# EAGLE board FMBTECH (EAGLE 8.4.3)
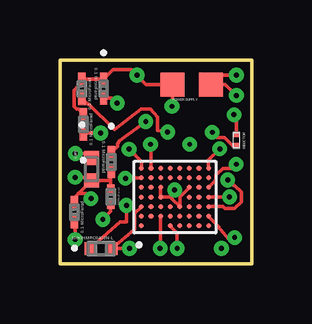
[diagram p0: board, top side]
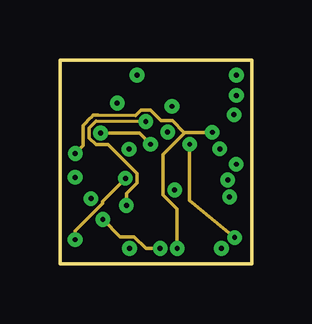
[diagram p1: board, inner layer Route4]
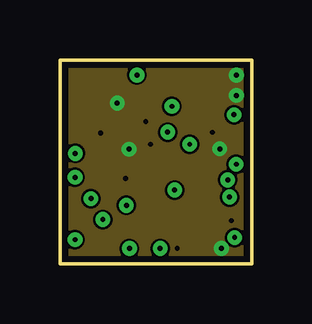
[diagram p2: board, inner layer Route8]
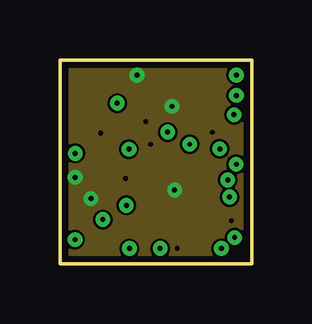
[diagram p3: board, inner layer Route10]
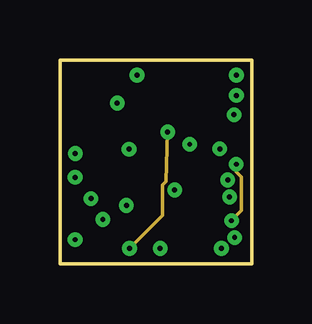
[diagram p4: board, inner layer Route12]
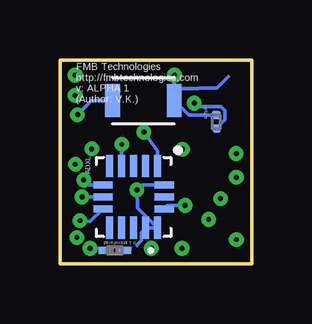
[diagram p5: board, bottom side, seen from below]

Size 8 x 8.5 mm. Coordinates in mm from the lower left corner, seen from the top.
Outline: 0,0 8,0 8,8.5 0,8.5 0,0
Copper layers (((1*4)*8*10)*(12*16)): Top 0.035mm / dielectric 1.5mm / Route4 0.035mm / dielectric 0.15mm / Route8 0.035mm / dielectric 0.15mm / Route10 0.035mm / dielectric 0.15mm / Route12 0.035mm / dielectric 0.15mm / Bottom 0.035mm
Design rules "default *": minimum track width 4mil, minimum drill 8mil, track to track 4mil, track to pad 4mil, pad to pad 4mil, via to via 4mil, smd to smd 2mil, copper to edge 10mil, drill to drill 10mil, minimum pad ring 10mil, minimum via ring 8mil, stop-mask expansion 4mil, vias tented up to drill 0mil, thermal gap 10mil

## Footprints (pad centres in the part's own frame; a part is rotated, then mirrored left to right if it is on the bottom)
TFLGA-16/3.3MMX3.1MM = smd 0.925 x 0.3: 1 -1.288,1; 2 -1.288,0.5; 3 -1.288,0; 4 -1.288,-0.5; 5 -1.288,-1; 9 1.288,-1; 10 1.288,-0.5; 11 1.288,0; 12 1.288,0.5; 13 1.288,1 | smd 0.3 x 0.8: 6 -0.5,-1.275; 7 0,-1.275; 8 0.5,-1.275; 14 0.5,1.275; 15 0,1.275; 16 -0.5,1.275
1 = smd 0.62 x 1.36: 1 0,0; 2 2.58,0
0201 = smd 0.559 x 0.305: 1 -0.394,0; 2 0.394,0
G-033 = smd 0.406 x 0.305: 1 -0.305,0; 2 0.305,0
BGA50N40P7X8_300X320X40 = smd 0.2 x 0.2: A1 -1.2,1.4; A2 -0.8,1.4; A3 -0.4,1.4; A4 0,1.4; A5 0.4,1.4; A6 0.8,1.4; A7 1.2,1.4; B2 -0.8,1; B3 -0.4,1; B4 0,1; B5 0.4,1; B6 0.8,1; B7 1.2,1; C2 -0.8,0.6; C3 -0.4,0.6; C4 0,0.6; C5 0.4,0.6; C6 0.8,0.6; C7 1.2,0.6; D1 -1.2,0.2; D2 -0.8,0.2; D3 -0.4,0.2; D6 0.8,0.2; D7 1.2,0.2; E1 -1.2,-0.2; E2 -0.8,-0.2; E3 -0.4,-0.2; E6 0.8,-0.2; E7 1.2,-0.2; F1 -1.2,-0.6; F2 -0.8,-0.6; F3 -0.4,-0.6; F4 0,-0.6; F5 0.4,-0.6; F6 0.8,-0.6; F7 1.2,-0.6; G1 -1.2,-1; G2 -0.8,-1; G3 -0.4,-1; G4 0,-1; G5 0.4,-1; G6 0.8,-1; G7 1.2,-1; H1 -1.2,-1.4; H2 -0.8,-1.4; H3 -0.4,-1.4; H4 0,-1.4; H5 0.4,-1.4; H6 0.8,-1.4; H7 1.2,-1.4
RES = smd 0.457 x 0.508: 1 -0.457,0; 2 0.457,0
CAP = smd 0.34 x 0.36: 1 -0.28,0; 2 0.28,0
CAP' = smd 0.58 x 0.62: 1 -0.47,0; 2 0.47,0
1' = smd 0.23 x 0.3: 1 -0.235,0; 2 0.235,0
SUPPLY = smd 1 x 1: P$1 0,0; P$2 1.6,0

## Placement (x,y rotation side)
ADXL  ADXL362  [TFLGA-16/3.3MMX3.1MM]  4.92,2.78 270 bottom
ANT1  ANTENNASMD  [1]  5.81,6.8 0 bottom
C1  02016D104KAT2A  [0201]  0.98,5.81 90 top
C2  02016D104KAT2A  [0201]  0.61,2.15 90 top
C3  GRM0335C1E101JA01D  [G-033]  2.12,2.78 90 top
C6  02016D104KAT2A  [0201]  5.71,0.55 180 bottom
C7  02016D104KAT2A  [0201]  1.82,7.3 270 top
C8  02016D104KAT2A  [0201]  2.14,4.24 270 top
C9  02016D104KAT2A  [0201]  0.92,7.29 90 top
NRF  NRF52832-CIAA-R  [BGA50N40P7X8_300X320X40]  4.8,2.78 90 top
R6  100OHMRC0402N-L  [RES]  1.72,0.63 180 top
U$1  4.7µF  [CAP]  1.48,5.91 270 bottom
U$2  0.8PF  [CAP']  1.32,3.94 270 top
U$3  INDUCTOR  [1']  7.37,5.15 90 top
U$4  SUPPLY  [SUPPLY]  4.69,7.48 0 top

## Library data of the parts
ADXL = ADXL362; AVAILABILITY: Good; DESCRIPTION: Accelerometer Triple ±2/±4/±8g 1.6V to 3.6V 16-Pin LGA T/R; MF: Analog Devices; MP: ADXL362BCCZ-RL7; PACKAGE: LGA-16 Analog Devices; PRICE: 6.52 USD
ANT1 = antenna; AVAILABILITY: Good; DESCRIPTION: Bluetooth/WLAN/WiFi Ceramic Chip Antenna 3-Pin SMD; MF: Pulse; MP: W3008; PACKAGE: None; PRICE: 0.93 USD
C1 C2 C6-C9 = cap_1microfarad; MANUFACTURER_PART_NUMBER: 02016D104KAT2A; VENDOR: AVX Corporation
C3 = cap_100picofarad; MANUFACTURER_PART_NUMBER: GRM0335C1E101JA01D; VENDOR: Murata
NRF = NRF52832-CIAA-R; AVAILABILITY: Good; DESCRIPTION: Multi Protocal Bluetooth Smart ANT 2.4GHz RF SoC (WL-CSP); MF: Nordic Semiconductor; MP: NRF52832-CIAA-R; PACKAGE: XFBGA-50 Nordic Semiconductor; PRICE: 3.94 USD
R6 = 100ohm; MANUFACTURER_PART_NUMBER: RC0402FR07100RL; VENDOR: Yageo
U$1 = 4p7microfarad
U$2 = 0p8picofarad
U$3 = inductor
U$4 = supply

## Nets
ADXL_POWER: ADXL.1 C9.1 NRF.A3 R6.1
ANT: NRF.D1 U$2.1 U$3.1
CS: ADXL.8 NRF.H5
DCC: NRF.B6
DEC2: NRF.A2
GND: ADXL.12 ADXL.13 ADXL.16 ANT1.2 C1.2 C2.2 C3.2 C6.1 C7.1 C8.2 C9.2 NRF.C4 NRF.C5 NRF.E3 NRF.F5 U$1.1 U$2.2 U$4.P$1
MISO: ADXL.7 NRF.H4
MOSI: ADXL.6 NRF.H3
N$5: ANT1.1 U$3.2
N$6: C2.1 NRF.A6
N$8: C1.1 NRF.B7
N$9: C3.1 NRF.C2
N$10: ADXL.14 C8.1 R6.2
RESET: NRF.H1
SCL: NRF.G7
SCLK: ADXL.4 NRF.H2
SDA: NRF.F7
STATUSLED: NRF.H6
SWDCLK: NRF.F1
SWDIO: NRF.G1
TMP_POWER: NRF.A4
VCC: C6.2 C7.2 NRF.A7 NRF.H7 U$1.2 U$4.P$2
VSS_PA: NRF.D2

## Tracks (layer width: path | path; a pad name or v marks a point on that pad's centre or on a via)
ADXL_POWER  (via drill 0.2 pad 0.46)
  Top 0.152: NRF.A3 3.12,2.09 3.12,1.44 R6.1 2.33,0.64 v2.9,0.64 | 0.84,6.82 C9.1 1.15,6.66 1.2,6.66 2.27,5.59 3.38,6.45 3.78,6.45 4.07,6.11 4.07,5.56 v4.49,5.49
  Route12 0.152: v4.49,5.49 4.42,3.42 4.28,3.27 4.28,2.01 v2.9,0.64
  Bottom 0.152: v4.49,5.49 3.92,4.71 ADXL.1
ANT  (via drill 0.2, 0.2 layers 1-4)
  Top 0.152: v6.36,5.48 6.57,5.27 6.87,5.27 7.23,4.92 U$3.1 | v4.89,0.64 4.89,1.29 NRF.D1 | U$2.1 1.14,4.6 v0.64,4.6
  Route4 0.152: 6.34,5.46 v6.36,5.48 5.19,5.48 | v0.64,4.6 0.96,4.92 0.96,5.75 1.04,5.82 1.25,6.05 1.32,6.12 1.39,6.2 1.4,6.2 1.5,6.2 1.6,6.2 3.16,6.19 3.38,6.41 3.78,6.41 4.22,5.97 4.69,5.97 5.19,5.48 | 5.19,5.48 5.19,5.43 4.3,4.55 4.3,2.87 4.89,2.28 v4.89,0.64
CS  (via drill 0.2 pad 0.46, 0.2 pad 0.46 layers 12-16)
  Top 0.152: v7.36,4.15 7.19,3.97 6.8,3.97 6.52,3.69 6.52,3.5 NRF.H5
  Route12 0.152: v7.36,4.15 7.36,3.82 7.56,3.61 7.56,2.22 v7.16,1.79
  Bottom 0.152: ADXL.8 6.73,1.75 v7.16,1.79
GND  (via drill 0.2, 0.2 pad 0.46, 0.2 pad 0.46 layers 1-10)
  Top 0.152: v4.68,6.56 4.69,6.58 U$4.P$1 3.6,7.48 v3.22,7.87 2.99,8.09 2.22,8.09 C7.1 0.93,7.7 C9.2 0.92,7.58 0.59,7.25 0.59,6.54 0.69,6.44 0.79,6.44 C1.2 | 2.12,3.44 C3.2 | 2.12,3.44 2.12,3.83 C8.2 | NRF.C5 NRF.C4 4.6,2.78 4.69,2.7 | 4.69,2.7 NRF.E3 5,2.78 NRF.F5 | 4.69,2.7 4.69,3 v4.78,3.07 | C2.2 0.61,2.76 U$2.2 | U$2.2 2.09,3.47 2.12,3.44 | 0.77,2.92 1.09,2.92 v1.3,2.71 | U$2.2 1.19,3.6 v0.64,3.6
  Route10 0.152: v4.68,6.56 4.68,6.54 4.67,6.54 | v4.78,3.07 4.77,3.09 4.78,3.09 | v0.64,3.6 v0.65,3.6
  Bottom 0.152: 3.22,7.23 v3.22,7.87 3.23,7.85 ANT1.2 | 3.22,7.23 3.22,6.81 ANT1.2 | U$1.1 2.62,6.19 ANT1.2 | 0.97,7.79 1.45,7.31 2.22,7.31 2.23,7.31 3.15,7.31 3.22,7.23 | 4.4,1.5 ADXL.12 | 4.4,1.5 ADXL.13 4.76,2.33 v4.78,3.07 4.55,3.28 ADXL.16 | 4.4,1.5 4.6,1.3 4.6,0.96 4.7,0.86 4.87,0.68 C6.1
  pour Route10: 0,0 8,0 8,8.5 0,8.5
MISO  (via drill 0.2 pad 0.46)
  Top 0.152: v7.08,2.78 ADXL.7
  Bottom 0.152: ADXL.7 v7.08,2.78
MOSI  (via drill 0.2 pad 0.46)
  Top 0.152: v7,3.49 7.23,3.26 7.28,3.26 7.56,2.98 7.56,2.58 7.28,2.3 6.88,2.3 6.8,2.38 NRF.H3
  Bottom 0.152: v7,3.49 6.79,3.28 ADXL.6
N$5  (via drill 0.2 pad 0.46)
  Top 0.152: v7.26,6.22 7.37,6.11 U$3.2
  Bottom 0.152: ANT1.1 6.68,6.8 v7.26,6.22
N$6  (via drill 0.2 pad 0.46, 0.2 pad 0.46 layers 1-4)
  Top 0.152: C2.1 0.64,1.73 v0.64,1 | v2.74,3.56 2.76,3.58 NRF.A6
  Route4 0.152: v2.74,3.56 1.78,2.6 1.78,2.51 0.64,1.37 v0.64,1
N$8  (via drill 0.2 pad 0.46 layers 1-4)
  Top 0.152: C1.1 1.09,5.45 v1.7,5.45 | v3.78,4.98 3.8,4.96 NRF.B7
  Route4 0.152: v1.7,5.45 3.31,5.45 v3.78,4.98
N$9  (via drill 0.2)
  Top 0.152: NRF.C2 4.2,0.66 v4.18,0.64 | v1.79,1.84 2.12,2.17 C3.1
  Route4 0.152: v4.18,0.64 3.59,0.64 3.1,1.12 2.52,1.12 v1.79,1.84
N$10  (via drill 0.2 layers 1-4, 0.2 pad 0.46)
  Top 0.152: R6.2 2.5,1.73 2.79,1.73 2.79,2.42 v2.78,2.43 | C8.1 2.4,4.89 2.4,4.98 2.47,5.11 v3.58,5.92
  Route4 0.152: v3.58,5.92 1.5,5.95 1.22,5.65 1.22,5.25 1.5,4.96 2.01,4.96 3.22,3.76 3.22,3.36 2.78,2.92 v2.78,2.43
  Bottom 0.152: v2.78,2.43 3.5,2.43 ADXL.14
SCLK  (via drill 0.2 pad 0.46)
  Top 0.152: NRF.H2 6.64,1.53 6.61,1.51 6.69,1.43 7.06,1.02 v7.29,1.09
  Route4 0.152: v7.29,1.09 5.41,2.64 v5.41,4.98
  Bottom 0.152: v5.41,4.98 5.42,4.97 ADXL.4
VCC  (via drill 0.2, 0.2 pad 0.46)
  Top 0.152: NRF.H7 6.2,4.31 v6.67,4.79 | NRF.A7 3.4,4.26 v2.88,4.78 | C7.2 2.15,6.91 v2.39,6.7 | v7.36,7.87 6.68,7.87 U$4.P$2 6.9,7.48 v7.36,7.01
  Route8 0.152: v7.36,7.87 v7.36,7.88 | v6.74,0.64 v6.75,0.64
  Bottom 0.152: U$1.2 1.48,5.65 1.12,6 1.12,6.38 1.28,6.54 2.32,6.54 v2.39,6.7 | C6.2 6.25,0.64 v6.74,0.64
  pour Route8: 0,0 8,0 8,8.5 0,8.5

## Text on the board
bNames: FMB Technologies / http://fmbtechnologies.com / v: ALPHA 1 / (Author: V.K.)